# EAGLE board Pacman print (EAGLE 9.5.0)
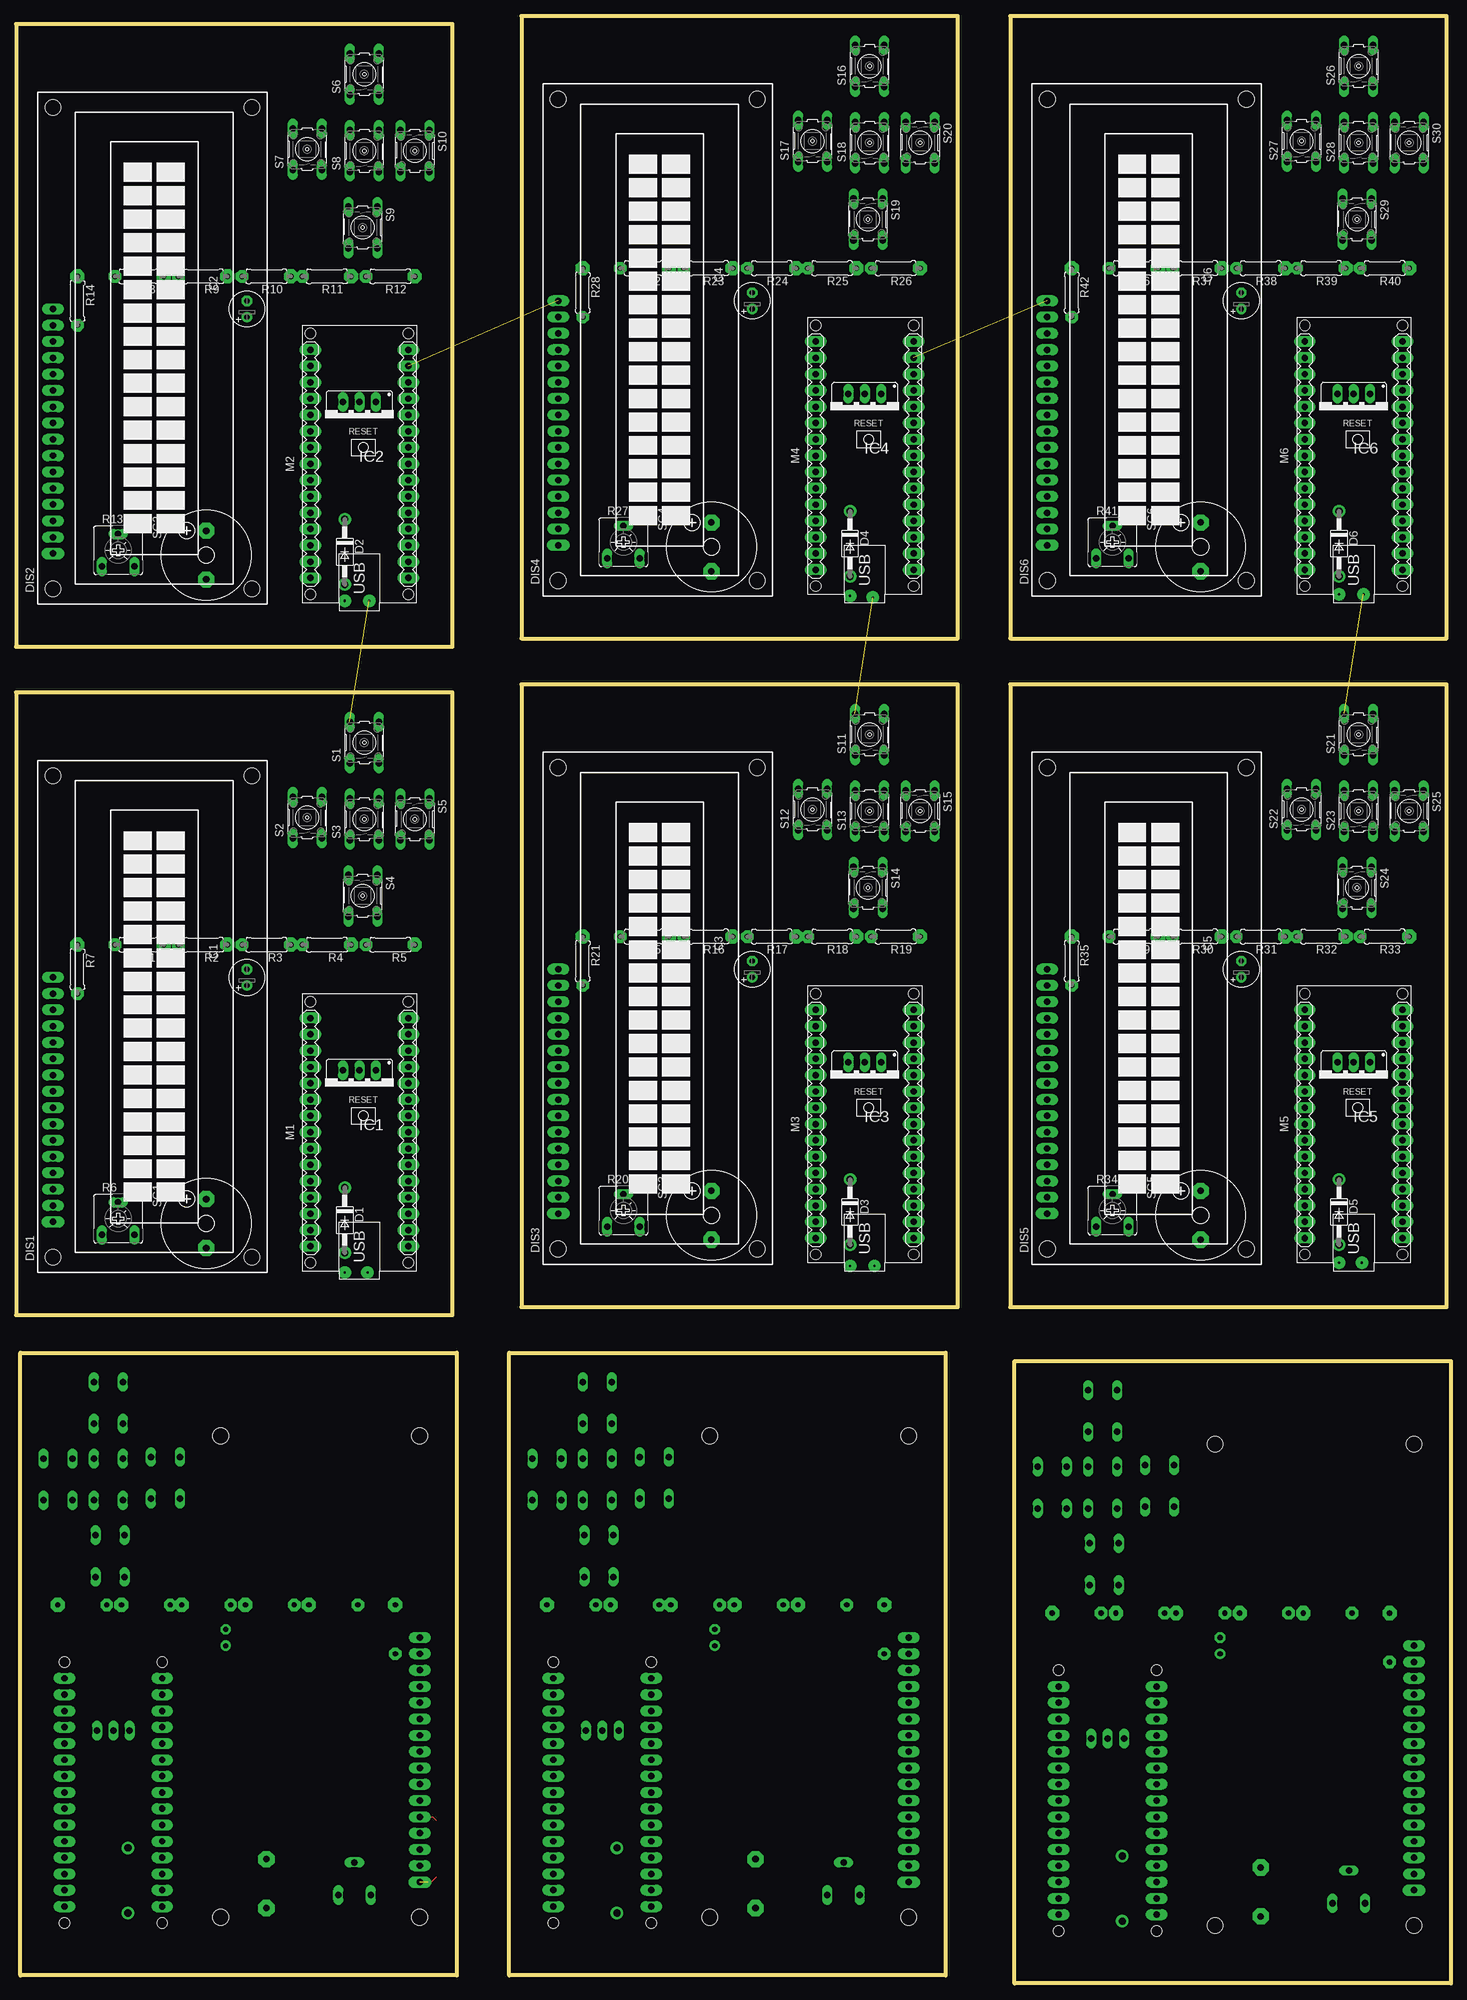
[diagram p0: board, top side]
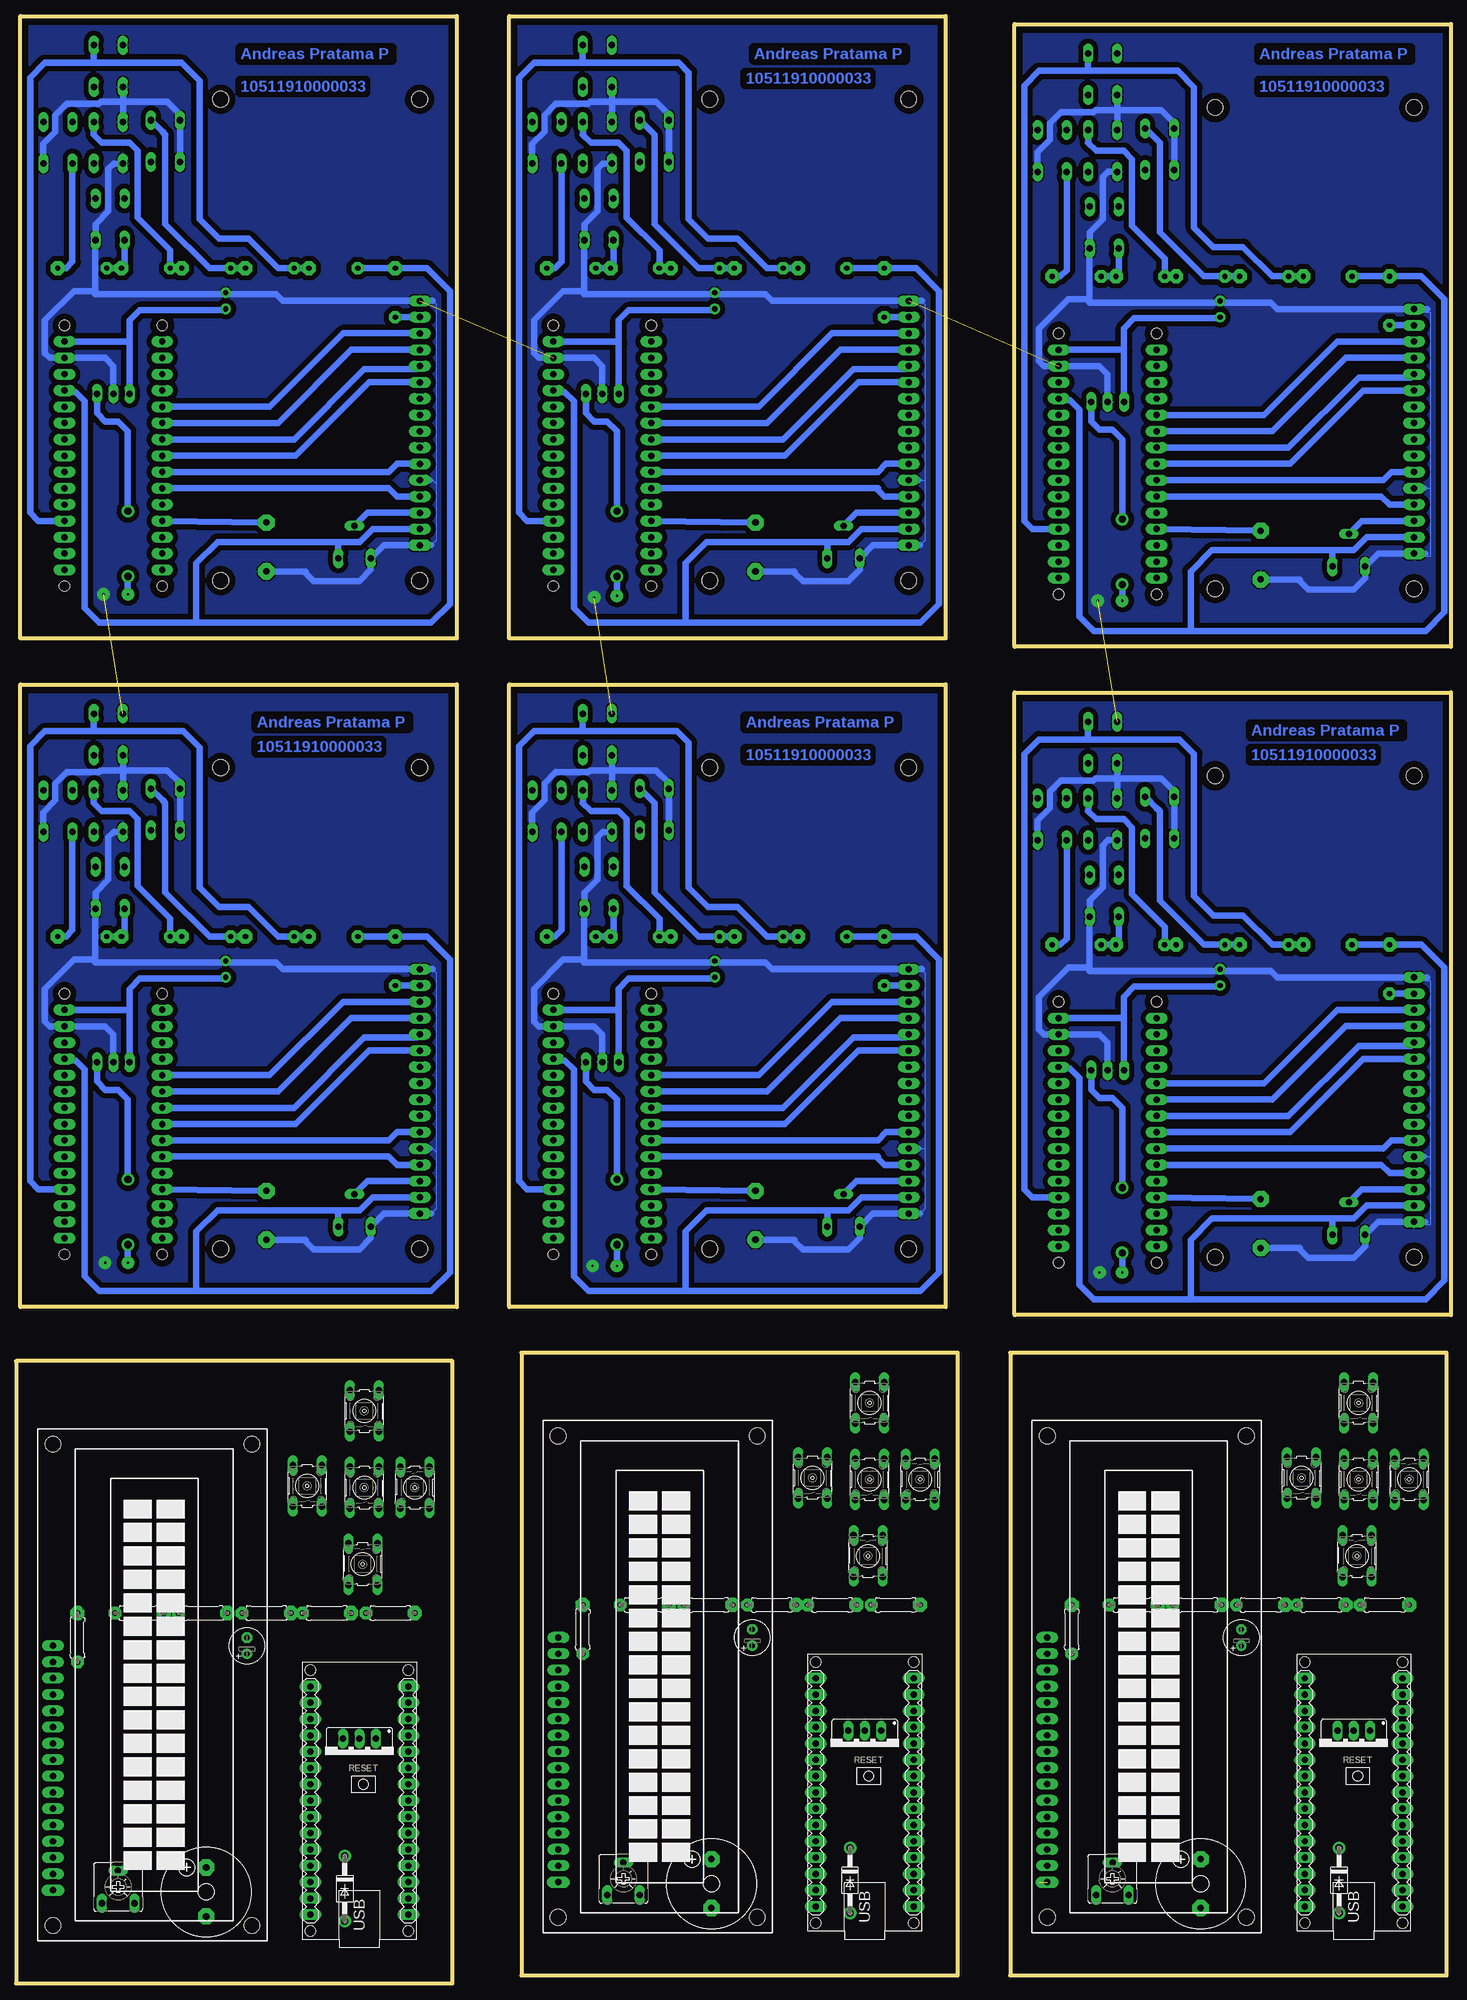
[diagram p1: board, bottom side, seen from below]

Size 223.6 x 306.55 mm. Coordinates in mm from the lower left corner, seen from the top.
Outline: 68,208.28 68,305.28 0,305.28 0,208.28 68,208.28
Outline: 146.74,209.55 146.74,306.55 78.74,306.55 78.74,209.55 146.74,209.55
Outline: 222.94,209.55 222.94,306.55 154.94,306.55 154.94,209.55 222.94,209.55
Outline: 68,104.14 68,201.14 0,201.14 0,104.14 68,104.14
Outline: 146.74,105.41 146.74,202.41 78.74,202.41 78.74,105.41 146.74,105.41
Outline: 222.94,105.41 222.94,202.41 154.94,202.41 154.94,105.41 222.94,105.41
Outline: 155.6,0 155.6,97 223.6,97 223.6,0 155.6,0
Outline: 76.86,1.27 76.86,98.27 144.86,98.27 144.86,1.27 76.86,1.27
Outline: 0.66,1.27 0.66,98.27 68.66,98.27 68.66,1.27 0.66,1.27
Copper layers (1*16): Top 0.035mm / dielectric 1.5mm / Bottom 0.035mm
Design rules "default": minimum track width 6mil, minimum drill 0.35mm, track to track 24mil, track to pad 24mil, pad to pad 24mil, via to via 24mil, smd to smd 24mil, copper to edge 40mil, drill to drill 6mil, minimum pad ring 10mil, minimum via ring 8mil, stop-mask expansion 4mil, vias tented up to drill 0mil, thermal gap 10mil

## Footprints (pad centres in the part's own frame; a part is rotated, then mirrored left to right if it is on the bottom)
E2,5-6 = drill 0.813 pad 1.6: + -1.27,0 | drill 0.813 pad 1.6 octagon: - 1.27,0
DO41-10 = drill 1.118 pad 1.93: A 5.08,0; C -5.08,0
TUXGR_16X2_R2 = drill 1 pad 1.778 long: 1 -32,15.5 | drill 1 pad 1.676 long: 2 -29.46,15.5; 3 -26.92,15.5; 4 -24.38,15.5; 5 -21.84,15.5; 6 -19.3,15.5; 7 -16.76,15.5; 8 -14.22,15.5; 9 -11.68,15.5; 10 -9.14,15.5; 11 -6.6,15.5; 12 -4.06,15.5; 13 -1.52,15.5; 14 1.02,15.5; 15 3.56,15.5; 16 6.1,15.5 | hole 2.5: -37.5,-15.5; 37.5,-15.5; -37.5,15.5; 37.5,15.5
78XXS = drill 1.016 long: GND 0,-2.54; IN -2.54,-2.54; OUT 2.54,-2.54
ARDUINO-NANO-3.0 = drill 1 pad 1.676 long: J1.1 17.78,7.62; J1.2 15.24,7.62; J1.3 12.7,7.62; J1.4 10.16,7.62; J1.5 7.62,7.62; J1.6 5.08,7.62; J1.7 2.54,7.62; J1.8 0,7.62; J1.9 -2.54,7.62; J1.10 -5.08,7.62; J1.11 -7.62,7.62; J1.12 -10.16,7.62; J1.13 -12.7,7.62; J1.14 -15.24,7.62; J1.15 -17.78,7.62; J2.1 17.78,-7.62; J2.2 15.24,-7.62; J2.3 12.7,-7.62; J2.4 10.16,-7.62; J2.5 7.62,-7.62; J2.6 5.08,-7.62; J2.7 2.54,-7.62; J2.8 0,-7.62; J2.9 -2.54,-7.62; J2.10 -5.08,-7.62; J2.11 -7.62,-7.62; J2.12 -10.16,-7.62; J2.13 -12.7,-7.62; J2.14 -15.24,-7.62; J2.15 -17.78,-7.62 | hole 1.651: -20.32,7.62; -20.32,-7.62; 20.32,-7.62; 20.32,7.62
0207/7 = drill 0.813 pad 2.184 octagon: 1 -3.81,0 | drill 0.813 pad 1.93 octagon: 2 3.81,0
CA6V = drill 1.016 long: A -2.54,-2.54; E 2.54,-2.54; S 0,2.54
B3F-10XX = drill 1.016 long: 1 -3.251,2.261; 2 3.251,2.261; 3 -3.251,-2.261; 4 3.251,-2.261
F/CM12P = drill 1.016 pad 2.54 octagon: + 3.81,0; - -3.81,0

## Placement (x,y rotation side)
C1  [E2,5-6]  35.98,156.77 90 top
C2  [E2,5-6]  35.98,260.91 90 top
C3  [E2,5-6]  114.72,158.04 90 top
C4  [E2,5-6]  114.72,262.18 90 top
C5  [E2,5-6]  190.92,158.04 90 top
C6  [E2,5-6]  190.92,262.18 90 top
C7  [E2,5-6]  187.62,52.63 90 bottom
C8  [E2,5-6]  108.88,53.9 90 bottom
C9  [E2,5-6]  32.68,53.9 90 bottom
D1  1N4004  [DO41-10]  51.22,118.92 270 top
D2  1N4004  [DO41-10]  51.22,223.06 270 top
D3  1N4004  [DO41-10]  129.96,120.19 270 top
D4  1N4004  [DO41-10]  129.96,224.33 270 top
D5  1N4004  [DO41-10]  206.16,120.19 270 top
D6  1N4004  [DO41-10]  206.16,224.33 270 top
D7  1N4004  [DO41-10]  172.38,14.78 270 bottom
D8  1N4004  [DO41-10]  93.64,16.05 270 bottom
D9  1N4004  [DO41-10]  17.44,16.05 270 bottom
DIS1  TUXGR_16X2_R2  [TUXGR_16X2_R2]  21.25,150.67 90 top
DIS2  TUXGR_16X2_R2  [TUXGR_16X2_R2]  21.25,254.81 90 top
DIS3  TUXGR_16X2_R2  [TUXGR_16X2_R2]  99.99,151.94 90 top
DIS4  TUXGR_16X2_R2  [TUXGR_16X2_R2]  99.99,256.08 90 top
DIS5  TUXGR_16X2_R2  [TUXGR_16X2_R2]  176.19,151.94 90 top
DIS6  TUXGR_16X2_R2  [TUXGR_16X2_R2]  176.19,256.08 90 top
DIS7  TUXGR_16X2_R2  [TUXGR_16X2_R2]  202.35,46.53 90 bottom
DIS8  TUXGR_16X2_R2  [TUXGR_16X2_R2]  123.61,47.8 90 bottom
DIS9  TUXGR_16X2_R2  [TUXGR_16X2_R2]  47.41,47.8 90 bottom
IC1  [78XXS]  53.51,139.75 180 top
IC2  [78XXS]  53.51,243.89 180 top
IC3  [78XXS]  132.25,141.02 180 top
IC4  [78XXS]  132.25,245.16 180 top
IC5  [78XXS]  208.45,141.02 180 top
IC6  [78XXS]  208.45,245.16 180 top
IC7  [78XXS]  170.09,35.61 180 bottom
IC8  [78XXS]  91.35,36.88 180 bottom
IC9  [78XXS]  15.15,36.88 180 bottom
M1  ARDUINO-NANO-3.0  [ARDUINO-NANO-3.0]  53.51,132.64 90 top
M2  ARDUINO-NANO-3.0  [ARDUINO-NANO-3.0]  53.51,236.78 90 top
M3  ARDUINO-NANO-3.0  [ARDUINO-NANO-3.0]  132.25,133.91 90 top
M4  ARDUINO-NANO-3.0  [ARDUINO-NANO-3.0]  132.25,238.05 90 top
M5  ARDUINO-NANO-3.0  [ARDUINO-NANO-3.0]  208.45,133.91 90 top
M6  ARDUINO-NANO-3.0  [ARDUINO-NANO-3.0]  208.45,238.05 90 top
M7  ARDUINO-NANO-3.0  [ARDUINO-NANO-3.0]  170.09,28.5 90 bottom
M8  ARDUINO-NANO-3.0  [ARDUINO-NANO-3.0]  91.35,29.77 90 bottom
M9  ARDUINO-NANO-3.0  [ARDUINO-NANO-3.0]  15.15,29.77 90 bottom
R1  [0207/7]  19.22,161.85 180 top
R2  [0207/7]  29.12,161.85 180 top
R3  [0207/7]  39.03,161.85 180 top
R4  [0207/7]  48.43,161.85 180 top
R5  [0207/7]  58.33,161.85 180 top
R6  [CA6V]  15.91,119.17 0 top
R7  [0207/7]  9.56,158.04 270 top
R8  [0207/7]  19.22,265.99 180 top
R9  [0207/7]  29.12,265.99 180 top
R10  [0207/7]  39.03,265.99 180 top
R11  [0207/7]  48.43,265.99 180 top
R12  [0207/7]  58.33,265.99 180 top
R13  [CA6V]  15.91,223.31 0 top
R14  [0207/7]  9.56,262.18 270 top
R15  [0207/7]  97.96,163.12 180 top
R16  [0207/7]  107.86,163.12 180 top
R17  [0207/7]  117.77,163.12 180 top
R18  [0207/7]  127.17,163.12 180 top
R19  [0207/7]  137.07,163.12 180 top
R20  [CA6V]  94.65,120.44 0 top
R21  [0207/7]  88.3,159.31 270 top
R22  [0207/7]  97.96,267.26 180 top
R23  [0207/7]  107.86,267.26 180 top
R24  [0207/7]  117.77,267.26 180 top
R25  [0207/7]  127.17,267.26 180 top
R26  [0207/7]  137.07,267.26 180 top
R27  [CA6V]  94.65,224.58 0 top
R28  [0207/7]  88.3,263.45 270 top
R29  [0207/7]  174.16,163.12 180 top
R30  [0207/7]  184.06,163.12 180 top
R31  [0207/7]  193.97,163.12 180 top
R32  [0207/7]  203.37,163.12 180 top
R33  [0207/7]  213.27,163.12 180 top
R34  [CA6V]  170.85,120.44 0 top
R35  [0207/7]  164.5,159.31 270 top
R36  [0207/7]  174.16,267.26 180 top
R37  [0207/7]  184.06,267.26 180 top
R38  [0207/7]  193.97,267.26 180 top
R39  [0207/7]  203.37,267.26 180 top
R40  [0207/7]  213.27,267.26 180 top
R41  [CA6V]  170.85,224.58 0 top
R42  [0207/7]  164.5,263.45 270 top
R43  [0207/7]  204.38,57.71 180 bottom
R44  [0207/7]  194.48,57.71 180 bottom
R45  [0207/7]  184.57,57.71 180 bottom
R46  [0207/7]  175.17,57.71 180 bottom
R47  [0207/7]  165.27,57.71 180 bottom
R48  [CA6V]  207.68,15.03 0 bottom
R49  [0207/7]  214.03,53.9 270 bottom
R50  [0207/7]  125.64,58.98 180 bottom
R51  [0207/7]  115.74,58.98 180 bottom
R52  [0207/7]  105.83,58.98 180 bottom
R53  [0207/7]  96.43,58.98 180 bottom
R54  [0207/7]  86.53,58.98 180 bottom
R55  [CA6V]  128.94,16.3 0 bottom
R56  [0207/7]  135.29,55.17 270 bottom
R57  [0207/7]  49.44,58.98 180 bottom
R58  [0207/7]  39.54,58.98 180 bottom
R59  [0207/7]  29.63,58.98 180 bottom
R60  [0207/7]  20.23,58.98 180 bottom
R61  [0207/7]  10.33,58.98 180 bottom
R62  [CA6V]  52.74,16.3 0 bottom
R63  [0207/7]  59.09,55.17 270 bottom
S1  [B3F-10XX]  54.27,193.34 90 top
S2  [B3F-10XX]  45.38,181.66 90 top
S3  [B3F-10XX]  54.27,181.4 90 top
S4  [B3F-10XX]  54.01,169.47 270 top
S5  [B3F-10XX]  62.14,181.4 270 top
S6  [B3F-10XX]  54.27,297.48 90 top
S7  [B3F-10XX]  45.38,285.8 90 top
S8  [B3F-10XX]  54.27,285.54 90 top
S9  [B3F-10XX]  54.01,273.61 270 top
S10  [B3F-10XX]  62.14,285.54 270 top
S11  [B3F-10XX]  133.01,194.61 90 top
S12  [B3F-10XX]  124.12,182.93 90 top
S13  [B3F-10XX]  133.01,182.67 90 top
S14  [B3F-10XX]  132.75,170.74 270 top
S15  [B3F-10XX]  140.88,182.67 270 top
S16  [B3F-10XX]  133.01,298.75 90 top
S17  [B3F-10XX]  124.12,287.07 90 top
S18  [B3F-10XX]  133.01,286.81 90 top
S19  [B3F-10XX]  132.75,274.88 270 top
S20  [B3F-10XX]  140.88,286.81 270 top
S21  [B3F-10XX]  209.21,194.61 90 top
S22  [B3F-10XX]  200.32,182.93 90 top
S23  [B3F-10XX]  209.21,182.67 90 top
S24  [B3F-10XX]  208.95,170.74 270 top
S25  [B3F-10XX]  217.08,182.67 270 top
S26  [B3F-10XX]  209.21,298.75 90 top
S27  [B3F-10XX]  200.32,287.07 90 top
S28  [B3F-10XX]  209.21,286.81 90 top
S29  [B3F-10XX]  208.95,274.88 270 top
S30  [B3F-10XX]  217.08,286.81 270 top
S31  [B3F-10XX]  169.33,89.2 90 bottom
S32  [B3F-10XX]  178.22,77.52 90 bottom
S33  [B3F-10XX]  169.33,77.26 90 bottom
S34  [B3F-10XX]  169.58,65.33 270 bottom
S35  [B3F-10XX]  161.46,77.26 270 bottom
S36  [B3F-10XX]  90.59,90.47 90 bottom
S37  [B3F-10XX]  99.48,78.79 90 bottom
S38  [B3F-10XX]  90.59,78.53 90 bottom
S39  [B3F-10XX]  90.84,66.6 270 bottom
S40  [B3F-10XX]  82.72,78.53 270 bottom
S41  [B3F-10XX]  14.39,90.47 90 bottom
S42  [B3F-10XX]  23.28,78.79 90 bottom
S43  [B3F-10XX]  14.39,78.53 90 bottom
S44  [B3F-10XX]  14.64,66.6 270 bottom
S45  [B3F-10XX]  6.52,78.53 270 bottom
SG1  F/CM12P  [F/CM12P]  29.63,118.41 90 top
SG2  F/CM12P  [F/CM12P]  29.63,222.55 90 top
SG3  F/CM12P  [F/CM12P]  108.37,119.68 90 top
SG4  F/CM12P  [F/CM12P]  108.37,223.82 90 top
SG5  F/CM12P  [F/CM12P]  184.57,119.68 90 top
SG6  F/CM12P  [F/CM12P]  184.57,223.82 90 top
SG7  F/CM12P  [F/CM12P]  193.97,14.27 90 bottom
SG8  F/CM12P  [F/CM12P]  115.23,15.54 90 bottom
SG9  F/CM12P  [F/CM12P]  39.03,15.54 90 bottom

## Library data of the parts
C1-C9 = rcl; SPICEPREFIX: C
D1-D9 = diode
DIS1-DIS9 = display-lcd; OC_FARNELL: unknown; OC_NEWARK: unknown
IC1-IC9 = v-reg
M1-M9 = diy-modules
R1-R5 R7-R12 R14-R19 R21-R26 R28-R33 R35-R40 R42-R47 R49-R54 R56-R61 R63 = rcl; SPICEPREFIX: R
R6 R13 R20 R27 R34 R41 R48 R55 R62 = pot
S1-S45 = switch-omron; MPN: B3F-1000; OC_FARNELL: 176432; OC_NEWARK: 36M3542
SG1-SG9 = buzzer; OC_FARNELL: unknown; OC_NEWARK: unknown

## Nets
1: DIS2.14 M2.J1.5
2: DIS1.14 M1.J1.5
3: DIS1.13 M1.J1.6
3V1: M2.J2.14
3V2: M1.J2.14
3V3: M3.J2.14
3V4: M4.J2.14
3V5: M5.J2.14
3V6: M6.J2.14
3V7: M7.J2.14
3V8: M8.J2.14
3V9: M9.J2.14
4: DIS1.11 M1.J1.8
5: DIS1.12 M1.J1.7
5V1: DIS2.2 M2.J2.4 R8.2 R13.E R14.1
5V2: DIS1.2 M1.J2.4 R1.2 R6.E R7.1
5V3: DIS4.2 M4.J2.4 R22.2 R27.E R28.1
5V4: DIS3.2 M3.J2.4 R15.2 R20.E R21.1
5V5: DIS6.2 M6.J2.4 R36.2 R41.E R42.1
5V6: DIS5.2 M5.J2.4 R29.2 R34.E R35.1
6: DIS1.6 M1.J1.9
8: DIS2.13 M2.J1.6
9: DIS1.4 M1.J1.10
10: DIS2.11 M2.J1.8
11: DIS2.12 M2.J1.7
12: DIS2.6 M2.J1.9
13: DIS2.4 M2.J1.10
14: M2.J1.12 SG2.+
15: M1.J1.12 SG1.+
16: DIS3.14 M3.J1.5
17: DIS3.13 M3.J1.6
18: DIS3.11 M3.J1.8
19: DIS3.12 M3.J1.7
20: DIS3.6 M3.J1.9
21: DIS3.4 M3.J1.10
22: DIS4.14 M4.J1.5
23: DIS4.13 M4.J1.6
24: DIS4.11 M4.J1.8
25: DIS4.12 M4.J1.7
26: DIS4.6 M4.J1.9
27: DIS4.4 M4.J1.10
28: M4.J1.12 SG4.+
29: M3.J1.12 SG3.+
30: DIS5.14 M5.J1.5
31: DIS5.13 M5.J1.6
32: DIS5.11 M5.J1.8
33: DIS5.12 M5.J1.7
35: DIS5.6 M5.J1.9
36: DIS6.14 M6.J1.5
37: DIS6.13 M6.J1.6
38: DIS6.11 M6.J1.8
39: DIS6.12 M6.J1.7
40: DIS6.6 M6.J1.9
41: DIS6.4 M6.J1.10
42: M6.J1.12 SG6.+
43: DIS5.4 M5.J1.10
44: M5.J1.12 SG5.+
+5V1: C2.+ IC2.OUT M2.J2.1
+5V2: C1.+ IC1.OUT M1.J2.1
+5V3: C4.+ IC4.OUT M4.J2.1
+5V4: C3.+ IC3.OUT M3.J2.1
+5V5: C6.+ IC6.OUT M6.J2.1
+5V6: C5.+ IC5.OUT M5.J2.1
A1: M2.J2.12 R8.1 R9.2 S6.4
A2: M1.J2.12 R1.1 R2.2 S1.4
A3: M4.J2.12 R22.1 R23.2 S16.4
A4: M3.J2.12 R15.1 R16.2 S11.4
A5: M6.J2.12 R36.1 R37.2 S26.4
A6: M5.J2.12 R29.1 R30.2 S21.4
CN1: DIS2.3 R13.S
CN2: DIS1.3 R6.S
CN3: DIS4.3 R27.S
CN4: DIS3.3 R20.S
CN5: DIS6.3 R41.S
CN6: DIS5.3 R34.S
GND2: C1.- C2.- C3.- C4.- C5.- C6.- DIS1.1 DIS1.5 DIS1.16 DIS2.1 DIS2.5 DIS2.16 DIS3.1 DIS3.5 DIS3.16 DIS4.1 DIS4.5 DIS4.16 DIS5.1 DIS5.5 DIS5.16 DIS6.1 DIS6.5 DIS6.16 IC1.GND IC2.GND IC3.GND IC4.GND IC5.GND IC6.GND M1.J2.2 M2.J2.2 M3.J2.2 M4.J2.2 M5.J2.2 M6.J2.2 R6.A R13.A R20.A R27.A R34.A R41.A S1.1 S1.2 S2.1 S2.2 S3.1 S3.2 S4.2 S5.2 S6.1 S6.2 S7.1 S7.2 S8.1 S8.2 S9.2 S10.2 S11.1 S11.2 S12.1 S12.2 S13.1 S13.2 S14.2 S15.2 S16.1 S16.2 S17.1 S17.2 S18.1 S18.2 S19.2 S20.2 S21.1 S21.2 S22.1 S22.2 S23.1 S23.2 S24.2 S25.2 S26.1 S26.2 S27.1 S27.2 S28.1 S28.2 S29.2 S30.2 SG1.- SG2.- SG3.- SG4.- SG5.- SG6.-
GND.1: M1.J1.4
GND.2: M2.J1.4
GND.3: M3.J1.4
GND.4: M4.J1.4
GND.5: M5.J1.4
GND.6: M6.J1.4
GND.7: M7.J1.4
GND.8: M8.J1.4
GND.9: M9.J1.4
N$1: D1.C IC1.IN
N$2: R2.1 R3.2 S2.4
N$4: R3.1 R4.2 S3.4
N$5: R4.1 R5.2 S4.4
N$6: R5.1 S5.4
N$7: D2.C IC2.IN
N$8: R9.1 R10.2 S7.4
N$9: R10.1 R11.2 S8.4
N$10: R11.1 R12.2 S9.4
N$11: R12.1 S10.4
N$12: DIS2.15 R14.2
N$13: DIS1.15 R7.2
N$14: D3.C IC3.IN
N$15: R16.1 R17.2 S12.4
N$17: R17.1 R18.2 S13.4
N$19: D4.C IC4.IN
N$20: R23.1 R24.2 S17.4
N$21: R24.1 R25.2 S18.4
N$22: R25.1 R26.2 S19.4
N$23: R26.1 S20.4
N$24: DIS4.15 R28.2
N$25: R18.1 R19.2 S14.4
N$26: R19.1 S15.4
N$27: DIS3.15 R21.2
N$29: D5.C IC5.IN
N$30: R30.1 R31.2 S22.4
N$31: D6.C IC6.IN
N$32: R37.1 R38.2 S27.4
N$33: R38.1 R39.2 S28.4
N$34: R39.1 R40.2 S29.4
N$35: R40.1 S30.4
N$36: DIS6.15 R42.2
N$37: R31.1 R32.2 S23.4
N$38: R32.1 R33.2 S24.4
N$39: R33.1 S25.4
N$41: DIS5.15 R35.2
S$1: DIS9.16
S$2: DIS9.5
S$3: DIS9.1
S$4: D2.A
S$5: D4.A
S$8: D6.A
S$10: D5.A
S$12: D3.A
S$14: D1.A

## Tracks (layer width: path | path; a pad name or v marks a point on that pad's centre or on a via)
1
  Bottom 1.016: DIS2.14 17.69,255.83 29.12,244.4 M2.J1.5
2
  Bottom 1.016: DIS1.14 17.69,151.69 29.12,140.26 M1.J1.5
3
  Bottom 1.016: DIS1.13 16.42,149.15 27.85,137.72 M1.J1.6
4
  Bottom 1.016: M1.J1.8 25.06,132.64 13.62,144.07 DIS1.11
5
  Bottom 1.016: M1.J1.7 25.31,135.18 14.39,146.1 6.26,146.1 DIS1.12
5V1
  Bottom 1.016: DIS2.2 13.12,225.35 15.15,223.32 18.45,223.32 | 18.45,223.32 37.25,223.32 40.55,220.01 40.55,210.74 | 18.45,222.3 R13.E 18.45,223.32 | M2.J2.4 60.87,246.68 59.35,246.68 57.93,245.26 57.93,213 55.66,210.74 40.55,210.74 | 40.55,210.74 3.95,210.74 1.03,213.66 1.03,262.43 4.59,265.99 R14.1 R8.2
5V2
  Bottom 1.016: DIS1.2 13.12,121.21 15.15,119.18 18.45,119.18 | 18.45,119.18 37.25,119.18 40.55,115.87 40.55,106.6 | 18.45,118.16 R6.E 18.45,119.18 | M1.J2.4 60.87,142.54 59.35,142.54 57.93,141.12 57.93,108.86 55.66,106.6 40.55,106.6 | 40.55,106.6 3.95,106.6 1.03,109.52 1.03,158.29 4.59,161.85 R7.1 R1.2
5V3
  Bottom 1.016: DIS4.2 91.86,226.62 93.89,224.59 97.19,224.59 | 97.19,224.59 115.99,224.59 119.29,221.28 119.29,212.01 | M4.J2.4 139.61,247.95 138.09,247.95 136.67,246.53 136.67,214.27 134.41,212.01 119.29,212.01 | 119.29,212.01 82.69,212.01 79.77,214.93 79.77,263.7 83.33,267.26 R28.1 R22.2 | 97.19,224.59 R27.E
5V4
  Bottom 1.016: DIS3.2 91.86,122.48 93.89,120.45 97.19,120.45 | 97.19,120.45 115.99,120.45 119.29,117.14 119.29,107.87 | M3.J2.4 139.61,143.81 138.09,143.81 136.67,142.39 136.67,110.13 134.41,107.87 119.29,107.87 | 119.29,107.87 82.69,107.87 79.77,110.79 79.77,159.56 83.33,163.12 R21.1 R15.2 | 97.19,120.45 R20.E
5V5
  Bottom 1.016: DIS6.2 168.06,226.62 170.09,224.59 173.39,224.59 | 173.39,224.59 192.19,224.59 195.49,221.28 195.49,212.01 | M6.J2.4 215.81,247.95 214.29,247.95 212.87,246.53 212.87,214.27 210.61,212.01 195.49,212.01 | 195.49,212.01 158.89,212.01 155.97,214.93 155.97,263.7 159.53,267.26 R42.1 R36.2 | 173.39,224.59 R41.E
5V6
  Bottom 1.016: DIS5.2 168.06,122.48 170.09,120.45 173.39,120.45 | 173.39,120.45 192.19,120.45 195.49,117.14 195.49,107.87 | M5.J2.4 215.81,143.81 214.29,143.81 212.87,142.39 212.87,110.13 210.61,107.87 195.49,107.87 | 195.49,107.87 158.89,107.87 155.97,110.79 155.97,159.56 159.53,163.12 R35.1 R29.2 | 173.39,120.45 R34.E
6
  Bottom 1.016: DIS1.6 9.3,131.37 10.58,130.1 M1.J1.9
8
  Bottom 1.016: DIS2.13 16.42,253.29 27.85,241.86 M2.J1.6
9
  Bottom 1.016: DIS1.4 9.56,126.29 | 9.56,126.29 9.57,126.29 | M1.J1.10 10.83,127.56 9.56,126.29
10
  Bottom 1.016: M2.J1.8 25.06,236.78 13.62,248.21 DIS2.11
11
  Bottom 1.016: M2.J1.7 25.31,239.32 14.39,250.24 6.26,250.24 DIS2.12
12
  Bottom 1.016: DIS2.6 9.3,235.51 10.58,234.24 M2.J1.9
13
  Bottom 1.016: DIS2.4 9.56,230.43 | 9.56,230.43 9.57,230.43 | M2.J1.10 10.83,231.7 9.56,230.43
14
  Bottom 1.016: M2.J1.12 SG2.+
15
  Bottom 1.016: M1.J1.12 SG1.+
16
  Bottom 1.016: DIS3.14 96.43,152.96 107.86,141.53 M3.J1.5
17
  Bottom 1.016: DIS3.13 95.16,150.42 106.59,138.99 M3.J1.6
18
  Bottom 1.016: M3.J1.8 103.8,133.91 92.36,145.34 DIS3.11
19
  Bottom 1.016: M3.J1.7 104.05,136.45 93.13,147.37 85,147.37 DIS3.12
20
  Bottom 1.016: DIS3.6 88.04,132.64 89.32,131.37 M3.J1.9
21
  Bottom 1.016: DIS3.4 88.31,127.56 89.57,128.83 | 89.32,128.83 89.57,128.83 | 89.57,128.83 M3.J1.10
22
  Bottom 1.016: DIS4.14 96.43,257.1 107.86,245.67 M4.J1.5
23
  Bottom 1.016: DIS4.13 95.16,254.56 106.59,243.13 M4.J1.6
24
  Bottom 1.016: M4.J1.8 103.8,238.05 92.36,249.48 DIS4.11
25
  Bottom 1.016: M4.J1.7 104.05,240.59 93.13,251.51 85,251.51 DIS4.12
26
  Bottom 1.016: DIS4.6 88.04,236.78 89.32,235.51 M4.J1.9
27
  Bottom 1.016: DIS4.4 88.31,231.7 89.57,232.97 | 89.32,232.97 89.57,232.97 | 89.57,232.97 M4.J1.10
28
  Bottom 1.016: M4.J1.12 SG4.+
29
  Bottom 1.016: M3.J1.12 SG3.+
30
  Bottom 1.016: DIS5.14 172.63,152.96 184.06,141.53 M5.J1.5
31
  Bottom 1.016: DIS5.13 171.36,150.42 182.79,138.99 M5.J1.6
32
  Bottom 1.016: M5.J1.8 180,133.91 168.56,145.34 DIS5.11
33
  Bottom 1.016: M5.J1.7 180.25,136.45 169.33,147.37 161.2,147.37 DIS5.12
35
  Bottom 1.016: DIS5.6 164.24,132.64 165.52,131.37 M5.J1.9
36
  Bottom 1.016: DIS6.14 172.63,257.1 184.06,245.67 M6.J1.5
37
  Bottom 1.016: DIS6.13 171.36,254.56 182.79,243.13 M6.J1.6
38
  Bottom 1.016: M6.J1.8 180,238.05 168.56,249.48 DIS6.11
39
  Bottom 1.016: M6.J1.7 180.25,240.59 169.33,251.51 161.2,251.51 DIS6.12
40
  Bottom 1.016: DIS6.6 164.24,236.78 165.52,235.51 M6.J1.9
41
  Bottom 1.016: M6.J1.10 165.52,232.97 164.25,231.7 DIS6.4
42
  Bottom 1.016: M6.J1.12 SG6.+
43
  Bottom 1.016: M5.J1.10 165.52,128.83 164.25,127.56 DIS5.4
44
  Bottom 1.016: M5.J1.12 SG5.+
+5V1
  Bottom 1.016: IC2.OUT 50.97,254.3 | 50.97,254.3 51.22,254.56 M2.J2.1 | 50.97,254.3 50.97,257.86 49.38,259.44 36.17,259.44 C2.+
+5V2
  Bottom 1.016: IC1.OUT 50.97,150.16 | 50.97,150.16 51.22,150.42 M1.J2.1 | 50.97,150.16 50.97,153.72 49.38,155.31 36.17,155.31 C1.+
+5V3
  Bottom 1.016: IC4.OUT 129.71,255.57 | 129.71,255.57 129.96,255.83 M4.J2.1 | 129.71,255.57 129.71,259.13 128.12,260.72 114.91,260.72 C4.+
+5V4
  Bottom 1.016: IC3.OUT 129.71,151.43 | 129.71,151.43 129.96,151.69 M3.J2.1 | 129.71,151.43 129.71,154.99 128.12,156.58 114.91,156.58 C3.+
+5V5
  Bottom 1.016: IC6.OUT 205.91,255.57 | 205.91,255.57 206.16,255.83 M6.J2.1 | 205.91,255.57 205.91,259.13 204.32,260.72 191.11,260.72 C6.+
+5V6
  Bottom 1.016: IC5.OUT 205.91,151.43 | 205.91,151.43 206.16,151.69 M5.J2.1 | 205.91,151.43 205.91,154.99 204.32,156.58 191.11,156.58 C5.+
A1
  Bottom 1.016: R8.1 R9.2 27.85,265.99 32.42,270.56 37,270.56 40.04,273.61 40.04,295.45 42.58,297.99 56.55,297.99 | M2.J2.12 65.19,226.62 66.46,227.89 66.46,295.7 64.17,297.99 56.55,297.99 | 56.55,297.99 56.55,300.71 S6.4
A2
  Bottom 1.016: R1.1 R2.2 27.85,161.85 32.42,166.42 37,166.42 40.04,169.47 40.04,191.56 42.33,193.85 56.55,193.85 | M1.J2.12 65.19,122.48 66.46,123.75 66.46,191.56 64.17,193.85 56.55,193.85 | 56.55,193.85 56.55,196.57 S1.4
A3
  Bottom 1.016: R22.1 R23.2 106.59,267.26 111.16,271.83 115.74,271.83 118.78,274.88 118.78,297.74 120.31,299.26 135.29,299.26 | M4.J2.12 143.93,227.89 145.2,229.16 145.2,296.97 142.91,299.26 135.29,299.26 | 135.29,299.26 135.29,301.98 S16.4
A4
  Bottom 1.016: R15.1 R16.2 106.59,163.12 111.16,167.69 115.74,167.69 118.78,170.74 118.78,193.34 120.56,195.12 135.29,195.12 | M3.J2.12 143.93,123.75 145.2,125.02 145.2,192.83 142.91,195.12 135.29,195.12 | 135.29,195.12 135.29,197.84 S11.4
A5
  Bottom 1.016: R36.1 R37.2 182.79,267.26 187.36,271.83 191.94,271.83 194.98,274.88 194.98,296.47 197.78,299.26 211.49,299.26 | M6.J2.12 220.13,227.89 221.4,229.16 221.4,296.97 219.11,299.26 211.49,299.26 | 211.49,299.26 211.49,301.98 S26.4
A6
  Bottom 1.016: R29.1 R30.2 182.79,163.12 187.36,167.69 191.94,167.69 194.98,170.74 194.98,192.58 197.52,195.12 211.49,195.12 | M5.J2.12 220.13,123.75 221.4,125.02 221.4,192.83 219.11,195.12 211.49,195.12 | 211.49,195.12 211.49,197.84 S21.4
CN1
  Bottom 1.016: R13.S 13.88,227.89 DIS2.3
CN2
  Bottom 1.016: R6.S 13.88,123.75 DIS1.3
CN3
  Bottom 1.016: R27.S 92.62,229.16 DIS4.3
CN4
  Bottom 1.016: R20.S 92.62,125.02 DIS3.3
CN5
  Bottom 1.016: R41.S 168.82,229.16 DIS6.3
CN6
  Bottom 1.016: R34.S 168.82,125.02 DIS5.3
GND2  (via drill 0.35 pad 1.93)  (5 unrouted)
  Bottom 0.152: DIS1.16 5.24,156.26 3.21,156.26 3.21,128.95 | DIS1.1 5.24,118.16 3.21,118.16 3.21,128.95 | DIS1.5 3.34,128.83 3.21,128.95 | 82.47,158.04 81.95,157.53 81.95,130.1 | 81.95,130.1 81.95,120.7 82.72,119.94 | DIS3.5 81.96,130.1 81.95,130.1 | 158.67,158.04 158.15,157.53 158.15,129.59 | 158.15,129.59 158.15,120.7 158.91,119.94 159.42,119.94 | DIS5.5 158.67,130.1 158.15,129.59 | 158.67,262.18 158.15,261.67 158.15,233.73 | 158.15,233.73 158.15,224.84 158.91,224.08 159.42,224.08 | DIS6.5 158.67,234.24 158.15,233.73 | 82.47,262.18 81.95,261.67 81.95,234.24 | 81.95,234.24 81.95,224.84 82.72,224.08 | DIS4.5 81.96,234.24 81.95,234.24 | DIS2.16 5.24,260.4 3.21,260.4 3.21,233.09 | DIS2.1 5.24,222.3 3.21,222.3 3.21,233.09 | DIS2.5 3.34,232.97 3.21,233.09
  Bottom 1.016: IC1.GND 53.51,146.61 54.78,147.88 M1.J2.2 63.41,147.88 64.17,148.64 64.17,153.72 59.6,158.29 56.55,158.29 | 3.98,118.67 DIS1.1 11.34,118.67 R6.A 13.37,114.86 15.15,113.08 22.26,113.08 23.53,114.35 23.53,114.6 SG1.- | 3.73,156.77 DIS1.16 27.09,156.77 28.11,157.78 56.31,157.78 56.31,166.18 S4.2 | DIS1.5 4.23,128.83 | 52.01,185.19 S3.2 51.98,184.68 51.98,187.5 | 56.27,166.93 S4.2 | 51.98,187.5 51.98,190.06 S1.1 | 51.98,187.5 51.73,187.75 | 51.73,187.75 45.12,187.75 43.12,185.75 S2.2 S2.1 | S3.1 53.45,178.15 54.27,177.34 54.27,170.74 56.27,168.73 S4.2 | 56.27,165.4 S4.2 | 51.73,187.75 55.45,187.75 55.75,187.45 60.8,187.45 62.52,185.72 62.52,183.12 64.43,181.21 64.43,177.59 64.4,177.62 S5.2 | IC3.GND 132.25,147.88 133.52,149.15 M3.J2.2 142.15,149.15 142.91,149.91 142.91,154.99 138.34,159.56 135.29,159.56 | 82.72,119.94 DIS3.1 90.08,119.94 R20.A 92.11,116.13 93.89,114.35 101,114.35 102.27,115.62 102.27,115.87 SG3.- | 82.47,158.04 DIS3.16 105.83,158.04 106.85,159.05 135.05,159.05 135.05,167.45 S14.2 | DIS3.5 82.97,130.1 | 130.75,186.46 S13.2 130.72,185.95 130.72,188.77 | 135.02,168.2 S14.2 | 130.72,188.77 130.72,191.34 S11.1 | 130.72,188.77 130.47,189.02 | 130.47,189.02 123.86,189.02 121.86,187.02 S12.2 S12.1 | S13.1 132.19,179.42 133.01,178.61 133.01,172.01 135.02,170 S14.2 | 135.02,166.67 S14.2 | 130.47,189.02 134.19,189.02 134.49,188.72 139.54,188.72 141.26,186.99 141.26,184.38 143.17,182.48 143.17,178.86 143.14,178.89 S15.2 | IC5.GND 208.45,147.88 209.72,149.15 M5.J2.2 218.35,149.15 219.11,149.91 219.11,154.99 214.54,159.56 211.49,159.56 | 158.92,119.94 159.42,119.94 DIS5.1 166.28,119.94 R34.A 168.31,116.13 170.09,114.35 177.2,114.35 178.47,115.62 178.47,115.87 SG5.-
  Bottom 1.016: 158.67,158.04 DIS5.16 182.03,158.04 183.05,159.05 211.25,159.05 211.25,167.45 S24.2 | DIS5.5 159.17,130.1 | 206.95,186.46 S23.2 206.92,185.95 206.92,188.77 | 211.22,168.2 S24.2 | 206.92,188.77 206.92,191.34 S21.1 | 206.92,188.77 206.67,189.02 | 206.67,189.02 200.06,189.02 198.06,187.02 S22.2 S22.1 | S23.1 208.4,179.42 209.21,178.61 209.21,172.01 211.22,170 S24.2 | 211.22,166.67 S24.2 | 206.67,189.02 210.38,189.02 210.69,188.72 215.74,188.72 217.46,186.99 217.46,184.38 219.37,182.48 219.37,178.86 219.34,178.89 S25.2 | IC6.GND 208.45,252.02 209.72,253.29 M6.J2.2 218.35,253.29 219.11,254.05 219.11,259.13 214.54,263.7 211.49,263.7 | 158.92,224.08 159.42,224.08 DIS6.1 166.28,224.08 R41.A 168.31,220.27 170.09,218.49 177.2,218.49 178.47,219.76 178.47,220.01 SG6.- | 158.67,262.18 DIS6.16 182.03,262.18 183.05,263.19 211.25,263.19 211.25,271.59 S29.2 | DIS6.5 159.17,234.24 | 206.95,290.6 S28.2 206.92,290.09 206.92,292.91 | 211.22,272.34 S29.2 | 206.92,292.91 206.92,295.48 S26.1 | 206.92,292.91 206.67,293.16 | 206.67,293.16 200.06,293.16 198.06,291.16 S27.2 S27.1 | S28.1 208.4,283.56 209.21,282.75 209.21,276.15 211.22,274.14 S29.2 | 211.22,270.81 S29.2 | 206.67,293.16 210.38,293.16 210.69,292.86 215.74,292.86 217.46,291.13 217.46,288.52 219.37,286.62 219.37,283 219.34,283.03 S30.2 | IC4.GND 132.25,252.02 133.52,253.29 M4.J2.2 142.15,253.29 142.91,254.05 142.91,259.13 138.34,263.7 135.29,263.7 | 82.72,224.08 DIS4.1 90.08,224.08 R27.A 92.11,220.27 93.89,218.49 101,218.49 102.27,219.76 102.27,220.01 SG4.- | 82.47,262.18 DIS4.16 105.83,262.18 106.85,263.19 135.05,263.19 135.05,271.59 S19.2
  Bottom 1.016: DIS4.5 82.97,234.24 | 130.75,290.6 S18.2 130.72,290.09 130.72,292.91 | 135.02,272.34 S19.2 | 130.72,292.91 130.72,295.48 S16.1 | 130.72,292.91 130.47,293.16 | 130.47,293.16 123.86,293.16 121.86,291.16 S17.2 S17.1 | S18.1 132.19,283.56 133.01,282.75 133.01,276.15 135.02,274.14 S19.2 | 135.02,270.81 S19.2 | 130.47,293.16 134.19,293.16 134.49,292.86 139.54,292.86 141.26,291.13 141.26,288.52 143.17,286.62 143.17,283 143.14,283.03 S20.2 | IC2.GND 53.51,250.75 54.78,252.02 M2.J2.2 63.41,252.02 64.17,252.78 64.17,257.86 59.6,262.43 56.55,262.43 | 3.98,222.81 DIS2.1 11.34,222.81 R13.A 13.37,219 15.15,217.22 22.26,217.22 23.53,218.49 23.53,218.74 SG2.- | 3.73,260.91 DIS2.16 27.09,260.91 28.11,261.92 56.31,261.92 56.31,270.32 S9.2 | DIS2.5 4.23,232.97 | 52.01,289.33 S8.2 51.98,288.82 51.98,291.64 | 56.27,271.07 S9.2 | 51.98,291.64 51.98,294.2 S6.1 | 51.98,291.64 51.73,291.89 | 51.73,291.89 45.12,291.89 43.12,289.89 S7.2 S7.1 | S8.1 53.45,282.29 54.27,281.48 54.27,274.88 56.27,272.87 S9.2 | 56.27,269.54 S9.2 | 51.73,291.89 55.45,291.89 55.75,291.59 60.8,291.59 62.52,289.86 62.52,287.25 64.43,285.35 64.43,281.73 64.4,281.76 S10.2
  other vias: 54.78,110.79 133.77,111.81 209.72,112.32 209.97,216.46 133.52,215.95 55.03,215.44
  pour Bottom (isolate 0.813): -0.09,104.19 67.98,104.19 67.98,201.22 -0.09,201.22
  pour Bottom (isolate 0.813): 78.65,105.46 146.72,105.46 146.72,202.49 78.65,202.49
  pour Bottom (isolate 0.813): 154.85,105.46 222.92,105.46 222.92,202.49 154.85,202.49
  pour Bottom (isolate 0.813): 154.85,209.6 222.92,209.6 222.92,306.63 154.85,306.63
  pour Bottom (isolate 0.813): 78.65,209.6 146.72,209.6 146.72,306.63 78.65,306.63
  pour Bottom (isolate 0.813): -0.09,208.33 67.98,208.33 67.98,305.36 -0.09,305.36
N$1
  Bottom 1.016: D1.C 51.22,136.45 52.74,137.97 54.78,137.97 56.05,139.24 IC1.IN
N$2
  Bottom 1.016: R2.1 R3.2 38.52,161.85 45.38,168.7 45.38,182.67 45.89,183.18 45.91,183.18 S2.4
N$4
  Bottom 1.016: R3.1 R4.2 44.62,164.64 49.7,169.72 49.7,180.13 50.97,181.4 55.28,181.4 56.55,182.67 56.53,182.7 S3.4
N$5
  Bottom 1.016: R5.2 R4.1 52.24,162.1 51.75,162.58 S4.4
N$6
  Bottom 1.016: R5.1 60.87,161.85 59.88,162.84 S5.4
N$7
  Bottom 1.016: D2.C 51.22,240.59 52.74,242.11 54.78,242.11 56.05,243.38 IC2.IN
N$8
  Bottom 1.016: R9.1 R10.2 38.52,265.99 45.38,272.84 45.38,286.81 45.89,287.32 45.91,287.32 S7.4
N$9
  Bottom 1.016: R10.1 R11.2 44.62,268.78 49.7,273.86 49.7,284.27 50.97,285.54 55.28,285.54 56.55,286.81 56.53,286.84 S8.4
N$10
  Bottom 1.016: R12.2 R11.1 52.24,266.24 51.75,266.72 S9.4
N$11
  Bottom 1.016: R12.1 60.87,265.99 59.88,266.98 S10.4
N$12
  Bottom 1.016: DIS2.15 R14.2
N$13
  Bottom 1.016: DIS1.15 R7.2
N$14
  Bottom 1.016: D3.C 129.96,137.72 131.48,139.24 133.52,139.24 134.79,140.51 IC3.IN
N$15
  Bottom 1.016: R16.1 R17.2 117.26,163.12 124.12,169.97 124.12,183.94 124.63,184.45 124.65,184.45 S12.4
N$17
  Bottom 1.016: R17.1 R18.2 123.36,165.91 128.44,170.99 128.44,181.4 129.71,182.67 134.02,182.67 135.29,183.94 135.27,183.97 S13.4
N$19
  Bottom 1.016: D4.C 129.96,241.86 131.48,243.38 133.52,243.38 134.79,244.65 IC4.IN
N$20
  Bottom 1.016: R23.1 R24.2 117.26,267.26 124.12,274.11 124.12,288.08 124.63,288.59 124.65,288.59 S17.4
N$21
  Bottom 1.016: R24.1 R25.2 123.36,270.05 128.44,275.13 128.44,285.54 129.71,286.81 134.02,286.81 135.29,288.08 135.27,288.11 S18.4
N$22
  Bottom 1.016: R26.2 R25.1 130.98,267.51 130.49,267.99 S19.4
N$23
  Bottom 1.016: R26.1 139.61,267.26 138.62,268.25 S20.4
N$24
  Bottom 1.016: DIS4.15 R28.2
N$25
  Bottom 1.016: R19.2 R18.1 130.98,163.37 130.49,163.85 S14.4
N$26
  Bottom 1.016: R19.1 139.61,163.12 138.62,164.11 S15.4
N$27
  Bottom 1.016: DIS3.15 R21.2
N$29
  Bottom 1.016: D5.C 206.16,137.72 207.68,139.24 209.72,139.24 210.99,140.51 IC5.IN
N$30
  Bottom 1.016: R30.1 R31.2 193.46,163.12 200.32,169.97 200.32,183.94 200.83,184.45 200.85,184.45 S22.4
N$31
  Bottom 1.016: D6.C 206.16,241.86 207.68,243.38 209.72,243.38 210.99,244.65 IC6.IN
N$32
  Bottom 1.016: R37.1 R38.2 193.46,267.26 200.32,274.11 200.32,288.08 200.83,288.59 200.85,288.59 S27.4
N$33
  Bottom 1.016: R38.1 R39.2 199.56,270.05 204.64,275.13 204.64,285.54 205.91,286.81 210.22,286.81 211.49,288.08 211.47,288.11 S28.4
N$34
  Bottom 1.016: R40.2 R39.1 207.18,267.51 206.69,267.99 S29.4
N$35
  Bottom 1.016: R40.1 215.81,267.26 214.82,268.25 S30.4
N$36
  Bottom 1.016: DIS6.15 R42.2
N$37
  Bottom 1.016: R31.1 R32.2 199.56,165.91 204.64,170.99 204.64,181.4 205.91,182.67 210.22,182.67 211.49,183.94 211.47,183.97 S23.4
N$38
  Bottom 1.016: R33.2 R32.1 207.18,163.37 206.69,163.85 S24.4
N$39
  Bottom 1.016: R33.1 215.81,163.12 214.82,164.11 S25.4
N$41
  Bottom 1.016: DIS5.15 R35.2
S$2
  Top 0.152: 65.44,25.45 64.93,25.96 DIS9.5
S$3  (1 unrouted)
  Top 0.152: 65.44,16.56 64.69,15.8 64.17,15.8
S$4  (via drill 0.35 pad 1.93)
  Bottom 1.016: D2.A v51.22,215.44
S$5
  Bottom 1.016: 129.96,219.5 D4.A
S$6  (via drill 0.35 pad 1.93)
  Bottom 1.016: 129.96,219 v129.96,216.2
S$8  (via drill 0.35 pad 1.93)
  Bottom 1.016: D6.A v206.16,216.46
S$10  (via drill 0.35 pad 1.93)
  Bottom 1.016: D5.A v206.16,112.32
S$12  (via drill 0.35 pad 1.93)
  Bottom 1.016: D3.A v129.96,111.81
S$14  (via drill 0.35 pad 1.93)
  Bottom 1.016: D1.A v51.22,110.79

## Text on the board
Bottom: Andreas Pratama P | Andreas Pratama P | Andreas Pratama P | 10511910000033 | 10511910000033 | 10511910000033 | Andreas Pratama P | Andreas Pratama P | Andreas Pratama P | 10511910000033 | 10511910000033 | 10511910000033